# Altium PCB CAN-to-CAN.PcbDoc
Units mil, origin at the board's own origin, x right, y up, seen from the top; angles counter-clockwise.
Board outline 6000 x 4000 mil, 2 copper layers (Top Layer, Bottom Layer); 112 components, 85 nets, 381 pads, 0 vias.
Unrouted connection lines stored in the file: 192.
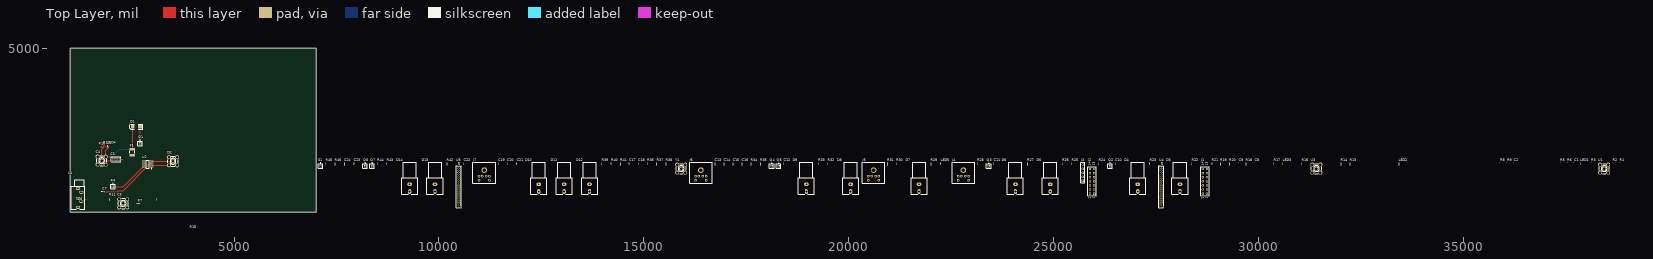
[diagram p0: Top Layer view]
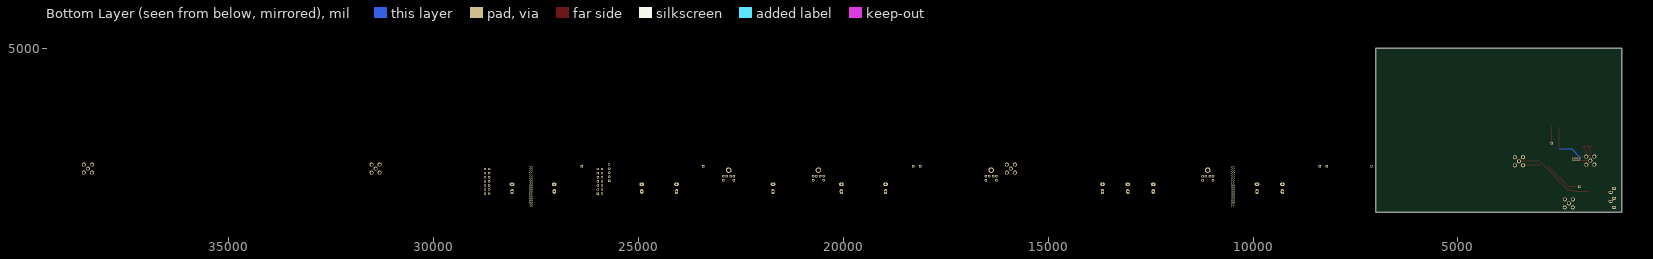
[diagram p1: Bottom Layer view, seen from below]

## Layer stack, top to bottom
Top Solder: solder mask 0.4, Solder Resist, Dk 3.5
Top Layer: signal copper 1.4
Dielectric 1: dielectric 12.6, FR-4, Dk 4.8
Bottom Layer: signal copper 1.4
Bottom Solder: solder mask 0.4, Solder Resist, Dk 3.5

## Board outline
1000,1000 7000,1000 7000,5000 1000,5000

## Design rules (kind name [scope] priority, off if disabled: settings)
Clearance [All] p1: gap=10 ignorepadtopadclearanceinfootprint=FALSE except(0: Arc-Hole Track-Hole SMDPad-Hole THPad-Hole Via-Hole Fill-Hole Poly-Hole Region-Hole Text-Hole)
PolygonConnect [All] p1: connectstyle=Relief reliefconductorwidth=10 reliefentries=4 polygonreliefangle="90 Angle" airgapwidth=10
RoomDefinition CAN-to-CAN [InComponentClass('CAN-to-CAN')] p1: confinementstyle=ConfineIn formatcopy=TRUE lockcomponents=FALSE outline 0,0 2000,0 2000,1000 0,1000
RoutingVias [All] p1: holewidth=28 width=50 viastyle="Through Hole" minholewidth=28 minwidth=50 maxholewidth=28 maxwidth=50
SolderMaskExpansion [All] p1: expansion=4
Width [All] p1: maxlimit=10 minlimit=10 preferedwidth=10
30 further rules are at their usual default settings.

## Components (designator, comment, footprint, x,y, rotation, side; value= is the part's Value field where it differs from the comment)
C1 "100n" 0603 37730,2200 r0 top
C2 "4n7" 0603 36260,2200 r0 top value=100n
C3 "100n" MHDR2X4 2045,2265 r0 top
C4 "10u/16" SMB_V-RJ45 1770,2255 r180 top value=470u/16
C5 "100u/6V3" SMB_V-RJ45 2295,1210 r0 top value=470u/16
C6 "100n" 0603 1421.22,1310 r0 top
C7 "100p" 0603 1808.78,1500 r0 top value=100pF
C8 "100n" 0603 29935,2200 r0 top
C9 "4n7" 0603 29545,2200 r0 top value=100n
C10 "100n" 0603 26500,2185 r90 top
C11 "100n" 0603 23535,2185 r90 top
C12 "100n" 0603 18415,2185 r90 top
C13 "100n" 0603 16735,2185 r90 top
C14 "100n" 0603 16955,2185 r90 top
C15 "100n" 0603 17175,2185 r90 top
C16 "100n" 0603 17395,2185 r90 top
C17 "27p" 0603 14640,2185 r90 top value=100n
C18 "27p" 0603 14860,2185 r90 top value=100n
C19 "100n" 0603 11445,2185 r90 top
C20 "100n" 0603 11665,2185 r90 top
C21 "100n" 0603 11895,2185 r90 top
C22 "100n" 0603 10605,2185 r90 top
C23 "100n" 0603 7925,2185 r90 top
C24 "10n" 0603 7695,2185 r90 top value=100pF
D1 "P6SMB15A" SMB 2618.58,3085 r180 top
D2 "LL5817" SMB_V-RJ45 3511.57,2238.43 r180 top
D3 "LL4148" RCA/4.5-H2 28080,1835 r90 top
D4 "BAT54S" RCA/4.5-H2 27050,1835 r90 top
D5 "LL4148" RCA/4.5-H2 24915,1835 r90 top
D6 "BAT54S" RCA/4.5-H2 24065,1835 r90 top
D7 "BAT54S" RCA/4.5-H2 21715,1835 r90 top
D8 "LL4148" RCA/4.5-H2 20045,1835 r90 top
D9 "BAT54S" RCA/4.5-H2 18965,1835 r90 top
D10 "BAT54S" RCA/4.5-H2 12435,1835 r90 top
D11 "BAT54S" RCA/4.5-H2 13055,1835 r90 top
D12 "BAT54S" RCA/4.5-H2 13675,1835 r90 top
D13 "LL4148" RCA/4.5-H2 9905,1835 r90 top
D14 "LL4448" RCA/4.5-H2 9285,1835 r90 top
F1 "Fuse 1" 1812 2520,2460.2 r90 top
J1 "Header 7X2" HDR2X7 28740,1450 r90 top
J2 "Header 7X2" HDR2X7 25985,1450 r90 top
J3 "ZL201" HDR1X5 25710,1760 r90 top
J4 "MX-43045-0400" PS2-6PIN 22795,2210 r0 top
J5 "MX-43045-0800" PS2-6PIN 20605,2210 r0 top
J6 "MX-43045-0600" PS2-6PIN 16390,2210 r0 top
J7 "MX-43045-0600" PS2-6PIN 11105,2210 r0 top
L1 "DL22-330" ST-3150-5N 1227.01,1781.65 r0 top value=100uH
LED1 "HCL-1904AYL" 0603 37850,2185 r90 top
LED2 "HCL-1903BG4" 0603 33425,2185 r90 top
LED3 "HCL-1906BR1" 0603 30590,2185 r90 top
LED4 "HCL-1904AYL" 0603 1910,2608.78 r90 top
LED5 "HCL-1906BR1" 0603 22240,2185 r90 top
Q1 "BSS138" PIN1 2710,2675 r0 top
Q2 "BSS123" PIN1 26375,2120 r0 top
Q3 "BSS123" PIN1 23415,2120 r0 top
Q4 "BSS123" PIN1 18120,2120 r0 top
Q5 "BSS123" PIN1 18290,2120 r0 top
Q6 "BSS123" PIN1 8200,2120 r0 top
Q7 "BSS123" PIN1 8370,2120 r0 top
R1 "CAN0001" 0603 38840,2200 r0 top
R2 "CAN0001" 0603 38670,2200 r0 top
R3 "nc" 0603 38150,2200 r0 top value=1K
R4 "1R" PIN1 2045,1620 r0 top value=1K
R5 "4k7" 0603 37390,2200 r0 top value=1K
R6 "1k" 0603 37560,2200 r0 top value=1K
R7 "3k6 1%" 0603 2678.78,1210 r0 top value=1K
R8 "68" 0603 35920,2200 r0 top value=1K
R9 "68" 0603 36090,2200 r0 top value=1K
R10 "1M" 0603 1720,2595 r180 top value=1K
R11 "1k2 1%" 0603 1960,1333.78 r90 top value=1K
R12 "4k7" 0603 1810,2606.22 r90 top value=1K
R13 "CAN0001" 0603 32230,2185 r90 top
R14 "CAN0001" 0603 32010,2185 r90 top
R15 "1k8" 0603 3115,1315 r90 top value=1K
R16 "nc" 0603 31050,2185 r90 top value=1K
R17 "4k7" 0603 30370,2185 r90 top value=1K
R18 "1k" 0603 29690,2185 r90 top value=1K
R19 "68" 0603 29070,2185 r90 top value=1K
R20 "68" 0603 29290,2185 r90 top value=1K
R21 "10k" 0603 28860,2185 r90 top value=1K
R22 "10k" 0603 28370,2185 r90 top value=1K
R23 "1k" 0603 27340,2185 r90 top value=1K
R24 "4k7" 0603 26100,2185 r90 top value=1K
R25 "10k" 0603 25440,2185 r90 top value=1K
R26 "10k" 0603 25210,2185 r90 top value=1K
R27 "1k" 0603 24360,2185 r90 top value=1K
R28 "4k7" 0603 23135,2185 r90 top value=1K
R29 "10k" 0603 22005,2185 r90 top value=1K
R30 "1k8" 0603 21155,2185 r90 top value=1K
R31 "10k" 0603 20945,2185 r90 top value=1K
R32 "1k" 0603 19485,2185 r90 top value=1K
R33 "nc" 0603 19255,2185 r90 top value=1K
R34 "4k7" 0603 17615,2185 r90 top value=1K
R35 "4k7" 0603 17845,2185 r90 top value=1K
R36 "10k" 0603 15080,2185 r90 top value=1K
R37 "10k" 0603 15310,2185 r90 top value=1K
R38 "10k" 0603 15540,2185 r90 top value=1K
R39 "470" 0603 13970,2185 r90 top value=1K
R40 "1k" 0603 14200,2185 r90 top value=1K
R41 "1k" 0603 14430,2185 r90 top value=1K
R42 "4k7" 0603 10195,2185 r90 top value=1K
R43 "10k" 0603 8725,2185 r90 top value=1K
R44 "4k7" 0603 8495,2185 r90 top value=1K
R45 "4k7" 0603 7235,2185 r90 top value=1K
R46 "4k7" 0603 7465,2185 r90 top value=1K
S1 "DTSM32NB" PIN1 7110,2120 r0 top
U1 "MCP2551-I/SN" SMB_V-RJ45 38430,2060 r0 top
U2 "MC33063AD" SO8_N 2895,2170 r180 top
U3 "MCP2551-I/SN" SMB_V-RJ45 31410,2060 r0 top
U4 "PIC30F5011" MHDR2X20 27650,1140 r90 top
U5 "MCP1320-46LT" MHDR2X20 10505,1140 r90 top
Y1 "10MHz" SMB_V-RJ45 15910,2060 r0 top

## Footprints (in the part's own frame and the unit in brackets; to place one, negate y for a bottom-side part, rotate by r counter-clockwise, add the part's x,y. Pads: shape width x height; smd on the part's side, far side on the other; paste and mask are expansions set on the pad)
0603 [mm] "Chip Inductor, Body 0.6x0.3mm, IPC High Density"
  rect 0.5x0.3 smd: 1(-0.35,0) 2(0.35,0)
  silkscreen extent -0.9,-0.05 -0.9,0.05, body extent -0.33,-0.18 0.33,0.18, height 0.55
1812 [mm] "Chip Capacitor, Body 4.5x3.2mm, IPC High Density"
  rect 1.4x3.3 smd: 1(-1.9,0) 2(1.9,0)
  silkscreen extent -0.8,-1.55 0.8,1.55, body extent -2.4,-1.7 2.4,1.7, height 1.4
HDR1X5 [mm] "Connector; Header; 5 Position"
  rect 1.5x1.5 hole 0.9: 1(0,0)
  round 1.5 hole 0.9: 2(2.54,0) 3(5.08,0) 4(7.62,0) 5(10.16,0)
  silkscreen extent -1.27,-1.27 11.43,1.27
HDR2X7 [mm] "Connector; Header; 7x2 Position"
  rect 1.5x1.5 hole 0.9: 1(0,0)
  round 1.5 hole 0.9: 2(0,2.54) 3(2.54,0) 4(2.54,2.54) 5(5.08,0) 6(5.08,2.54) 7(7.62,0) 8(7.62,2.54) 9(10.16,0) 10(10.16,2.54) 11(12.7,0) 12(12.7,2.54) 13(15.24,0) 14(15.24,2.54)
  silkscreen extent -1.27,-1.27 16.51,3.81
MHDR2X4 [mm] "Connector; Header; 4x2 Position"
  rect 1x1 hole 0.6: 1(0,0)
  round 1 hole 0.6: 2(0,1.27) 3(1.27,0) 4(1.27,1.27) 5(2.54,0) 6(2.54,1.27) 7(3.81,0) 8(3.81,1.27)
  silkscreen extent -0.9,-0.9 4.71,2.17
MHDR2X20 [mm] "Connector; Header; 20x2 Position"
  rect 1x1 hole 0.6: 1(0,0)
  round 1 hole 0.6: 2(0,1.27) 3(1.27,0) 4(1.27,1.27) 5(2.54,0) 6(2.54,1.27) 7(3.81,0) 8(3.81,1.27) 9(5.08,0) 10(5.08,1.27) 11(6.35,0) 12(6.35,1.27) 13(7.62,0) 14(7.62,1.27) 15(8.89,0) 16(8.89,1.27) 17(10.16,0) 18(10.16,1.27) 19(11.43,0) 20(11.43,1.27) 21(12.7,0) 22(12.7,1.27) 23(13.97,0) 24(13.97,1.27) 25(15.24,0) 26(15.24,1.27) 27(16.51,0) 28(16.51,1.27) 29(17.78,0) 30(17.78,1.27) 31(19.05,0) 32(19.05,1.27) 33(20.32,0) 34(20.32,1.27) 35(21.59,0) 36(21.59,1.27) 37(22.86,0) 38(22.86,1.27) 39(24.13,0) 40(24.13,1.27)
  silkscreen extent -0.9,-0.9 25.03,2.17
PIN1 [mm] "Connector; Plug"
  rect 1.5x1.5 hole 0.9: 1(0,0)
  silkscreen extent -1.4,-1.4 1.4,2.17
PS2-6PIN [mm] "PS2 Socket, 6 Pin, Through Hole"
  round 1.6 hole 0.9: 1(-1.25,-8.5) 2(1.25,-8.5) 3(-3.25,-8.5) 4(3.25,-8.5) 5(-3.25,-11) 6(3.25,-11)
  round 3.5 hole 2.3: S(0,-4.75)
  silkscreen extent -7,-12.75 7,0
RCA/4.5-H2 [mm] "Two Conductor Jack (RCA), Right Angle, Thru-Hole, Body 10 x 10 x 13 mm (WxTxH)"
  oval 2x3 hole 1.2: 1A(-4,0)
  oval 3x2 hole 1.2: 2B(-8.496,0)
  silkscreen extent -10.07,-5 9.5,5
SMB [mm] "DO-214-AA/SMB; 2 C-Bend Leads; Body 5.3 x 3.6 mm, inc. leads (LxW)"
  rect 2.3x2.3 smd: 1(-2.25,0) 2(2.25,0)
  silkscreen extent -3.8,-1.55 4.1,1.55
SMB_V-RJ45 [mm] "Connector; SMB Straight"
  round 2.5 hole 1.5: 1(0,0) 2(-2.5,2.5) 2(-2.5,-2.5) 2(2.5,2.5) 2(2.5,-2.5)
  silkscreen extent -3.15,-3.15 3.15,3.15
SO8_N [mm] "SOIC, 8-Leads, Body 4.9x3.9mm, Pitch 1.27mm, IPC Medium Density"
  oval 2.2x0.6 smd: 1(-2.4,1.905) 2(-2.4,0.635) 3(-2.4,-0.635) 4(-2.4,-1.905) 5(2.4,-1.905) 6(2.4,-0.635) 7(2.4,0.635) 8(2.4,1.905)
  silkscreen extent -2.53,-2.5 0.9,2.88, body extent -2,-2.5 2,2.5, height 1.75
ST-3150-5N [mm] "Connector; Stereo Jack, 3.5mm, 5 Position"
  oval 2.7x1.8 all layers, no hole: 1(-0.85,-5.2) 2(1.15,-7.65) 3(-0.85,-11.35) 4(1.15,-13.25) 5(-0.85,-17)
  round 1.2 hole 1: 1A(-1.3,-5.2) 1B(-0.4,-5.2) 2A(0.7,-7.65) 2B(1.6,-7.65) 3A(-1.3,-11.35) 3B(-0.4,-11.35) 4A(0.7,-13.25) 4B(1.6,-13.25) 5A(-1.3,-17) 5B(-0.4,-17)
  silkscreen extent -4.9,-18 3.2,0

## Part data
C1 C2 C3 C6 C7 C8 C9 C10 C11 C12 C13 C14 C15 C16 C17 C18 C19 C20 C21 C22 C23 C24: library part Cap, "Capacitor", LatestRevisionDate=17-Jul-2002, LatestRevisionNote="Re-released for DXP Platform.", PackageReference=RAD-0.3, Published=8-Jun-2000, Publisher="Altium Limited"
C4 C5: library part "Cap Pol1", "Polarized Capacitor (Radial)", LatestRevisionDate=17-Jul-2002, LatestRevisionNote="Re-released for DXP Platform.", PackageReference=RB7.6-15, Published=8-Jun-2000, Publisher="Altium Limited"
D1: library part "D Zener", "Zener Diode", LatestRevisionDate=17-Jul-2002, LatestRevisionNote="Re-released for DXP Platform.", PackageReference=DIODE-0.7, Published=8-Jun-2000, Publisher="Altium Limited"
D2 D3 D5 D8 D13: library part 1N4148, "High Conductance Fast Diode", Code_JEDEC=DO-204-AH, ComponentLink1Description="Manufacturer Link", ComponentLink1URL=http://www.fairchildsemi.com/, ComponentLink2Description=Datasheet, ComponentLink2URL=http://www.fairchildsemi.com/ds/1N%2F1N4148.pdf, DatasheetDocument=1997, LatestRevisionDate=17-Jul-2002, LatestRevisionNote="Re-released for DXP Platform.", PackageReference=DO-35, Published=8-Jun-2000, Publisher="Altium Limited"
D4 D6 D7 D9 D10 D11 D12: "Schottky Barrier Double Diode", ComponentLink1Description="Manufacturer Link", ComponentLink1URL=http://www.semiconductors.philips.com/, ComponentLink2Description=Datasheet, ComponentLink2URL=http://www.semiconductors.philips.com/acrobat/datasheets/BAT54_SERIES_4.pdf, DatasheetVersion=4-Mar-2002, LatestRevisionDate=12-Dec-2006, LatestRevisionNote="IPC-7351 Footprint Added.", PackageDescription="3-Pin SOT-23 Package 0.95 mm Pitch, 2.3 mm Lead Span", PackageReference=SOT23, PackageVersion=May-1999, Published=17-Sep-2003, Publisher="Altium Limited"
D14: library part Diode, "Default Diode", PackageDocument=Sep-1996, Code_JEDEC=DO-214-AB, LatestRevisionDate=17-Jul-2002, LatestRevisionNote="Re-released for DXP Platform.", PackageReference=SMC, Published=8-Jun-2000, Publisher="Altium Limited"
F1: "Fuse", LatestRevisionDate=17-Jul-2002, LatestRevisionNote="Re-released for DXP Platform.", PackageReference=PIN-W2/E2.8, Published=8-Jun-2000, Publisher="Altium Limited"
J1 J2: "Header, 7-Pin, Dual row", LatestRevisionDate=17-Jul-2002, LatestRevisionNote="Re-released for DXP Platform.", Publisher="Altium Limited"
J3: library part CON5, "Connector"
J4: library part "Header 2X2", "Header, 2-Pin, Dual row", LatestRevisionDate=17-Jul-2002, LatestRevisionNote="Re-released for DXP Platform.", Publisher="Altium Limited"
J5: library part "Header 4X2A", "Header, 4-Pin, Dual row", LatestRevisionDate=17-Jul-2002, LatestRevisionNote="Re-released for DXP Platform.", Publisher="Altium Limited"
J6 J7: library part "Header 6", "Header, 6-Pin", LatestRevisionDate=17-Jul-2002, LatestRevisionNote="Re-released for DXP Platform.", Publisher="Altium Limited"
L1: library part "Inductor Iron", "Magnetic-Core Inductor", Published=24-Mar-1999, Publisher="Altium Limited", Revision="July-2002: Re-released for DXP Platform."
LED1 LED2 LED3 LED4 LED5: library part LED3, "Typical BLUE SiC LED", Published=8-Jun-2000, Publisher="Altium Limited", Revision 1="Jul-2002: Re-released for DXP Platform.", Revision 2="17-Dec-2003: PCB Footprint replaced."
Q1: "N-Channel Enhancement Mode Vertical DMOS FET", ComponentLink1Description="Manufacturer Link", ComponentLink1URL=http://www.zetex.com/, ComponentLink2Description=Datasheet, ComponentLink2URL=www.zetex.com/3.0/pdf/BSS138.pdf, DatasheetVersion=Mar-96, PackageDescription="SOT-23; 3 Leads; Body 3.1 x 2.5 mm, inc. leads (LxW max), Alternate Lead Configuration", PackageReference=SOT23, PackageVersion=1996, Published=17-Dec-2003, Publisher="Altium Limited"
Q2 Q3 Q4 Q5 Q6 Q7: "N-channel Enhancement Mode Vertical D-MOSFET", ComponentLink1Description="Manufacturer Link", ComponentLink1URL=http://www.semiconductors.philips.com/, ComponentLink2Description=Datasheet, ComponentLink2URL=http://www.semiconductors.philips.com/acrobat/datasheets/BSS123_3.pdf, DatasheetVersion=Apr-1995, LatestRevisionDate=12-Dec-2006, LatestRevisionNote="IPC-7351 Footprint Added.", PackageDescription="3-Pin SOT-23 Package 0.95 mm Pitch, 2.3 mm Lead Span", PackageReference=SOT23, PackageVersion=May-1999, Published=17-Sep-2003, Publisher="Altium Limited"
R1 R2 R13 R14: library part "Res Varistor", "Varistor (Voltage-Sensitive Resistor)", LatestRevisionDate=04-Mar-2005, LatestRevisionNote="PCB Footprint replaced.", PackageReference=6-0805, Published=24-Mar-1999, Publisher="Altium Limited"
R3 R4 R5 R6 R7 R8 R9 R10 R11 R12 R15 R16 R17 R18 R19 R20 R21 R22 R23 R24 R25 R26 R27 R28 R29 R30 R31 R32 R33 R34 R35 R36 R37 R38 R39 R40 R41 R42 R43 R44 R45 R46: library part Res2, "Resistor", LatestRevisionDate=17-Jul-2002, LatestRevisionNote="Re-released for DXP Platform.", PackageReference=AXIAL-0.4, Published=8-Jun-2000, Publisher="Altium Limited"
S1: library part PUSHB, "Switch PushButton"
U1 U3: "High Speed CAN Transceiver, 8-Pin Plastic SOIC, Industrial Grade", Code_JEDEC=MS-012, ComponentLink1Description="Manufacturer Link", ComponentLink1URL=http://www.microchip.com, ComponentLink2Description=Datasheet, ComponentLink2URL=http://ww1.microchip.com/downloads/en/DeviceDoc/21667d.pdf, DatasheetVersion=Nov-2003, LatestRevisionDate=13-Apr-2006, LatestRevisionNote="IPC-7351 Footprint Added.", PackageDescription="8-Pin Plastic Narrow Body Small Outline Integrated Circuit 1.27 mm Pitch", PackageReference=SOIC150-8, PackageVersion=Oct-2005, Published=6-Oct-2005, Publisher="Altium Limited"
U2: "DC-to-DC Converter Control Circuit", Code_IPC=SOIC127P600-8, Code_JEDEC=MS-012-AA, ComponentLink1Description="Manufacturer Link", ComponentLink1URL=http://www.onsemi.com/site/products/taxonomy/0,4438,503,00.html, ComponentLink2Description=Datasheet, ComponentLink2URL=http://www.onsemi.com/pub/Collateral/MC34063A-D.PDF, DatasheetVersion=1988, LatestRevisionDate=13-Apr-2006, LatestRevisionNote="IPC-7351 Footprint Added.", PackageDescription="8-Pin Small Outline Integrated Circuit 1.27 mm Pitch", PackageReference=751-02, Published=17-Jul-2002, Publisher="Altium Limited"
U4: "PIC30F5011 - Up"
U5: library part MCP1320
Y1: library part XTAL, "Crystal Oscillator", LatestRevisionDate=17-Jul-2002, LatestRevisionNote="Re-released for DXP Platform.", PackageReference=R38, Published=8-Jun-2000, Publisher="Altium Limited"

## Nets (pads, with @x,y where several pads share a name; then routed paths per layer and width w, separated by ;. In a path a pad name is that pad's centre, name@x,y a point inside that pad or via, vN(x,y) a via of type N, cw(c..) or ccw(c..) an arc to the next point about the centre after c; other vN are vias at no path point)
+5V: C1.1 C5.1 C6.1 C8.1 C13.1 C14.1 C15.1 C16.1 C22.1 J1.2 J2.2 J2.4 J2.6 J3.2 J4.2 L1.2 LED1.1 LED2.1 LED3.1 LED5.1 R7.1 R22.1 R26.1 R31.1 R36.1 R37.1 R38.1 R42.1 R43.2 U4.10 U4.19 U4.26 U4.38 U5.5 | length 22.9
  Top Layer w10: L1.2 L1.2@1286.3,1494.48 ; C6.1 1409.25,1310 C6.1@1410.16,1309.09
+12V: C3.1 C4.1 D1.2 F1.2 J5.5 R10.1 R12.1 U2.6 | length 1934.8
  Top Layer w10: R10.1@1735,2595 R10.1 1734.68,2594.09 1809.09,2594.09 1810,2593.19 R12.1 1809.09,2591.54 1809.09,2574.09 1770,2535 C4.1 2035,2255 C3.1 ; F1.2 2530,2545 D1.2
  Bottom Layer w10: C3.1 2010.31,2299.69 2010.31,2329.37 2215.95,2535 2515,2535
+12VPWR: F1.1 J6.3 J7.3
ADC0: J1.4 U4.16
ADC1: J1.6 U4.15
ADC2: J1.8 U4.14
ADC3: J1.10 U4.13
ADC4: J1.12 U4.12
ButD: C10.1 R22.2 R23.2 U4.23
ButD_IN: J5.2 R23.1
ButN: C11.1 R26.2 R27.2 U4.22
ButN_IN: J5.3 R27.1
ButR: C12.1 R31.2 R32.2 U4.21
ButR_IN: J5.4 R32.1
CAN_BMS_TX: R17.2 U3.1
CAN_BMSS_H: J7.1 R13.2 R20.1
CAN_BMSS_L: J7.2 R14.1 R19.1
CAN_MUX_TX: R5.2 U1.1
CAN_MUXED_H: J6.1 R1.2 R9.1
CAN_MUXED_L: J6.2 R2.1 R8.1
ChrgLED: R45.1 U4.29
ChrgLED_OUT: J7.6 Q6.1
FluidHeater: R46.1 U4.30
FluidHeater_OUT: J6.6 Q7.1
GND: C1.2 C2.1 C3.2 C4.2 C5.2 C6.2 C7.1 C8.2 C9.1 C10.2 C11.2 C12.2 C13.2 C14.2 C15.2 C16.2 C17.2 C18.2 C19.2 C20.2 C21.2 C22.2 C23.1 C24.1 D2.1 J1.14 J2.12 J2.14 J3.3 J4.1 J5.1 LED4.2 R1.1 R2.2 R6.2 R11.1 R13.1 R14.2 R15.2 R18.2 R24.2 R28.2 R34.2 R35.2 R45.2 R46.2 S1.1 U1.2 U2.4 U3.2 U4.9 U4.20 U4.25 U5.2 | length 1044.3
  Top Layer w10: C6.2 C6.2@1435.91,1310.91 ; C7.1 1796.81,1500 C7.1@1797.72,1499.09 ; LED4.2 1910,2620.75 1910.91,2619.84 1922.12,2619.84 1945.86,2596.1 1945.86,2580.86 1868.43,2503.43 1868.43,2353.43 2006.57,2353.43 C3.2 ; U2.4 2992.09,2242.39 3507.61,2242.39 D2.1
GPIOC13: J2.3
GPIOC14: J2.1
GPIOD0: J2.5
GPIOD1: J1.13
GPIOD2: J1.11
GPIOD3: J1.9
GPIOD4: J1.7
GPIOD5: J1.5
GPIOD6: J1.3
GPIOD7: J1.1
GPIOD8: J2.13
GPIOD9: J2.11
GPIOD10: J2.9
GPIOD11: J2.7
GROUND: D1.1 J6.4 J7.4 Q1.1 | length 411.2
  Top Layer w10: D1.1 2710,3082.17 Q1.1
ILUM: J4.4 R34.1
IMP: C19.1 R36.2 R39.2 U4.11
IMP_IN: J4.3 R39.1
IsFHerror: C21.1 R38.2 R41.2 U4.32
IsFHerror_IN: J6.5 R41.1
IsHeating: C20.1 R37.2 R40.2 U4.31
IsHeating_IN: J7.5 R40.1
LightD: R24.1 U4.24
LightD_OUT: J5.6 Q2.1
LightN: R28.1 U4.27
LightN_OUT: Q3.1
LightR: R35.1 U4.28
LightR_OUT: Q5.1
MCLR: J3.1 R44.1 U4.7
NetC2_2: C2.2 R3.2 R8.2 R9.2
NetC7_2: C7.2 U2.3 | length 1461.8
  Top Layer w10: C7.2 2148.5,1500 2168.5,1520 2294.92,1520 2899.25,2124.33 2899.25,2136.26 2957.99,2195 U2.3
NetC9_2: C9.2 R16.2 R19.2 R20.2
NetC17_1: C17.1 U4.39 Y1.2
NetC18_1: C18.1 U4.40 Y1.1
NetC24_2: C24.2 R43.1 U5.3
NetD2_2: D2.2 L1.1 U2.2 | length 455.2
  Top Layer w10: L1.1 1195,1578.39 L1.1@1195,1605.83 ; U2.2 2991.99,2142.5 3410.65,2142.5 D2.2@3413.15,2140
NetD3_2: R21.2
NetD5_2: R25.2
NetD8_2: R29.2
NetLED1_2: LED1.2 R5.1
NetLED2_2: LED2.2 R15.1
NetLED3_2: LED3.2 R17.1
NetLED4_1: LED4.1 R12.2 | length 110.4
  Top Layer w10: R12.2 1847.5,2620 1872.5,2595 LED4.1
NetLED5_2: LED5.2 R30.1
NetQ1_3: R10.2
NetQ4_1: Q4.1 R21.1 R25.1 R29.1
NetR3_1: R3.1
NetR4_1: R4.1 U2.1 U2.7 U2.8 | length 952.3
  Top Layer w10: R4.1 2294.02,1620 2769.02,2095 U2.8
NetR6_1: R6.1
NetR7_2: R7.2 R11.2 U2.5
NetR16_1: R16.1
NetR18_1: R18.1
NetR30_2: R30.2 U4.37
NetR33_2: R33.2 U4.8
PGC: J3.5 U4.17
PGD: J3.4 U4.18
RESET: C23.2 R42.2 R44.2 U5.1
RX: J2.10 U4.34
TX: J2.8 U4.33
WDI: R33.1 U5.4
pads on no net: C3.3 C3.4 C3.5 C3.6 C3.7 C3.8 D3.1A D3.2B D4.1A D4.2B D5.1A D5.2B D6.1A D6.2B D7.1A D7.2B D8.1A D8.2B D9.1A D9.2B D10.1A D10.2B D11.1A D11.2B D12.1A D12.2B D13.1A D13.2B D14.1A D14.2B J4.5 J4.6 J4.S J5.S J6.S J7.S L1.1A L1.1B L1.2A L1.2B L1.3 L1.3A L1.3B L1.4 L1.4A L1.4B L1.5 L1.5A L1.5B U4.1 U4.2 U4.3 U4.4 U4.5 U4.6 U4.35 U4.36 U5.6 U5.7 U5.8 U5.9 U5.10 U5.11 U5.12 U5.13 U5.14 U5.15 U5.16 U5.17 U5.18 U5.19 U5.20 U5.21 U5.22 U5.23 U5.24 U5.25 U5.26 U5.27 U5.28 U5.29 U5.30 U5.31 U5.32 U5.33 U5.34 U5.35 U5.36 U5.37 U5.38 U5.39 U5.40
copper on no net: | length 0.7
  Top Layer w10: 1254.57,1480.47 1255.32,1480.47

## Text inside footprints (layer, text, board x,y; h text height)
C3: Top Overlay "1" at 1982.01,2245 h39.37; Top Overlay "7" at 2249.72,2245 h39.37
D3: Mechanical 1 "PCB Edge" at 28261.8,1821.89 h9.84 r180; Mechanical 1 "Alert PCB fab to slot details" at 27771.26,1439.07 h11.81 r90; Mechanical 1 "Slot 1.2x2.2mm, PTH" at 27790.94,1439.07 h11.81 r90; Mechanical 1 "Assign keep-out area to slot" at 27751.57,1439.07 h11.81 r90; Mechanical 1 "Mech 1 - Slot cut-out" at 27810.63,1439.07 h11.81 r90; Mechanical 1 "Mech 2 - Clearance, move to internal plane if present" at 27830.31,1439.07 h11.81 r90
D4: Mechanical 1 "PCB Edge" at 27231.8,1821.89 h9.84 r180; Mechanical 1 "Alert PCB fab to slot details" at 26741.26,1439.07 h11.81 r90; Mechanical 1 "Slot 1.2x2.2mm, PTH" at 26760.94,1439.07 h11.81 r90; Mechanical 1 "Assign keep-out area to slot" at 26721.57,1439.07 h11.81 r90; Mechanical 1 "Mech 1 - Slot cut-out" at 26780.63,1439.07 h11.81 r90; Mechanical 1 "Mech 2 - Clearance, move to internal plane if present" at 26800.31,1439.07 h11.81 r90
D5: Mechanical 1 "PCB Edge" at 25096.8,1821.89 h9.84 r180; Mechanical 1 "Alert PCB fab to slot details" at 24606.26,1439.07 h11.81 r90; Mechanical 1 "Slot 1.2x2.2mm, PTH" at 24625.94,1439.07 h11.81 r90; Mechanical 1 "Assign keep-out area to slot" at 24586.57,1439.07 h11.81 r90; Mechanical 1 "Mech 1 - Slot cut-out" at 24645.63,1439.07 h11.81 r90; Mechanical 1 "Mech 2 - Clearance, move to internal plane if present" at 24665.31,1439.07 h11.81 r90
D6: Mechanical 1 "PCB Edge" at 24246.8,1821.89 h9.84 r180; Mechanical 1 "Alert PCB fab to slot details" at 23756.26,1439.07 h11.81 r90; Mechanical 1 "Slot 1.2x2.2mm, PTH" at 23775.94,1439.07 h11.81 r90; Mechanical 1 "Assign keep-out area to slot" at 23736.57,1439.07 h11.81 r90; Mechanical 1 "Mech 1 - Slot cut-out" at 23795.63,1439.07 h11.81 r90; Mechanical 1 "Mech 2 - Clearance, move to internal plane if present" at 23815.31,1439.07 h11.81 r90
D7: Mechanical 1 "PCB Edge" at 21896.8,1821.89 h9.84 r180; Mechanical 1 "Alert PCB fab to slot details" at 21406.26,1439.07 h11.81 r90; Mechanical 1 "Slot 1.2x2.2mm, PTH" at 21425.94,1439.07 h11.81 r90; Mechanical 1 "Assign keep-out area to slot" at 21386.57,1439.07 h11.81 r90; Mechanical 1 "Mech 1 - Slot cut-out" at 21445.63,1439.07 h11.81 r90; Mechanical 1 "Mech 2 - Clearance, move to internal plane if present" at 21465.31,1439.07 h11.81 r90
D8: Mechanical 1 "PCB Edge" at 20226.8,1821.89 h9.84 r180; Mechanical 1 "Alert PCB fab to slot details" at 19736.26,1439.07 h11.81 r90; Mechanical 1 "Slot 1.2x2.2mm, PTH" at 19755.94,1439.07 h11.81 r90; Mechanical 1 "Assign keep-out area to slot" at 19716.57,1439.07 h11.81 r90; Mechanical 1 "Mech 1 - Slot cut-out" at 19775.63,1439.07 h11.81 r90; Mechanical 1 "Mech 2 - Clearance, move to internal plane if present" at 19795.31,1439.07 h11.81 r90
D9: Mechanical 1 "PCB Edge" at 19146.8,1821.89 h9.84 r180; Mechanical 1 "Alert PCB fab to slot details" at 18656.26,1439.07 h11.81 r90; Mechanical 1 "Slot 1.2x2.2mm, PTH" at 18675.94,1439.07 h11.81 r90; Mechanical 1 "Assign keep-out area to slot" at 18636.57,1439.07 h11.81 r90; Mechanical 1 "Mech 1 - Slot cut-out" at 18695.63,1439.07 h11.81 r90; Mechanical 1 "Mech 2 - Clearance, move to internal plane if present" at 18715.31,1439.07 h11.81 r90
D10: Mechanical 1 "PCB Edge" at 12616.8,1821.89 h9.84 r180; Mechanical 1 "Alert PCB fab to slot details" at 12126.26,1439.07 h11.81 r90; Mechanical 1 "Slot 1.2x2.2mm, PTH" at 12145.94,1439.07 h11.81 r90; Mechanical 1 "Assign keep-out area to slot" at 12106.57,1439.07 h11.81 r90; Mechanical 1 "Mech 1 - Slot cut-out" at 12165.63,1439.07 h11.81 r90; Mechanical 1 "Mech 2 - Clearance, move to internal plane if present" at 12185.32,1439.07 h11.81 r90
D11: Mechanical 1 "PCB Edge" at 13236.8,1821.89 h9.84 r180; Mechanical 1 "Alert PCB fab to slot details" at 12746.26,1439.07 h11.81 r90; Mechanical 1 "Slot 1.2x2.2mm, PTH" at 12765.94,1439.07 h11.81 r90; Mechanical 1 "Assign keep-out area to slot" at 12726.57,1439.07 h11.81 r90; Mechanical 1 "Mech 1 - Slot cut-out" at 12785.63,1439.07 h11.81 r90; Mechanical 1 "Mech 2 - Clearance, move to internal plane if present" at 12805.32,1439.07 h11.81 r90
D12: Mechanical 1 "PCB Edge" at 13856.8,1821.89 h9.84 r180; Mechanical 1 "Alert PCB fab to slot details" at 13366.26,1439.07 h11.81 r90; Mechanical 1 "Slot 1.2x2.2mm, PTH" at 13385.94,1439.07 h11.81 r90; Mechanical 1 "Assign keep-out area to slot" at 13346.57,1439.07 h11.81 r90; Mechanical 1 "Mech 1 - Slot cut-out" at 13405.63,1439.07 h11.81 r90; Mechanical 1 "Mech 2 - Clearance, move to internal plane if present" at 13425.32,1439.07 h11.81 r90
D13: Mechanical 1 "PCB Edge" at 10086.8,1821.89 h9.84 r180; Mechanical 1 "Alert PCB fab to slot details" at 9596.26,1439.07 h11.81 r90; Mechanical 1 "Slot 1.2x2.2mm, PTH" at 9615.94,1439.07 h11.81 r90; Mechanical 1 "Assign keep-out area to slot" at 9576.57,1439.07 h11.81 r90; Mechanical 1 "Mech 1 - Slot cut-out" at 9635.63,1439.07 h11.81 r90; Mechanical 1 "Mech 2 - Clearance, move to internal plane if present" at 9655.32,1439.07 h11.81 r90
D14: Mechanical 1 "PCB Edge" at 9466.8,1821.89 h9.84 r180; Mechanical 1 "Alert PCB fab to slot details" at 8976.26,1439.07 h11.81 r90; Mechanical 1 "Slot 1.2x2.2mm, PTH" at 8995.94,1439.07 h11.81 r90; Mechanical 1 "Assign keep-out area to slot" at 8956.57,1439.07 h11.81 r90; Mechanical 1 "Mech 1 - Slot cut-out" at 9015.63,1439.07 h11.81 r90; Mechanical 1 "Mech 2 - Clearance, move to internal plane if present" at 9035.32,1439.07 h11.81 r90
J1: Top Overlay "2" at 28660,1330 h50 r90; Top Overlay "1" at 28760,1330 h50 r90; Top Overlay "14" at 28660,2130 h50 r90; Top Overlay "13" at 28760,2130 h50 r90
J2: Top Overlay "2" at 25905,1330 h50 r90; Top Overlay "1" at 26005,1330 h50 r90; Top Overlay "14" at 25905,2130 h50 r90; Top Overlay "13" at 26005,2130 h50 r90
L1: Mechanical 1 "Mech 2 - Clearance, move to internal plane if present" at 942.52,1796.37 h11.81; Mechanical 1 "Mech 1 - Slot cut-out" at 942.52,1816.06 h11.81; Mechanical 1 "Assign keep-out area to slot" at 942.52,1875.11 h11.81; Mechanical 1 "Slot 1x1.9mm, PTH" at 942.52,1835.74 h11.81; Mechanical 1 "Alert PCB fab to slot details" at 942.52,1855.43 h11.81
U4: Top Overlay "39" at 27670,2140 h39.37 r90; Top Overlay "1" at 27670,1077.01 h39.37 r90
U5: Top Overlay "39" at 10525,2140 h39.37 r90; Top Overlay "1" at 10525,1077.01 h39.37 r90